# Altium PCB PCB1.PcbDoc
Units mil, origin at the board's own origin, x right, y up, seen from the top; angles counter-clockwise.
Board outline 6000 x 4000 mil, 2 copper layers (Top Layer, Bottom Layer); 7 components, 5 nets, 15 pads, 0 vias.
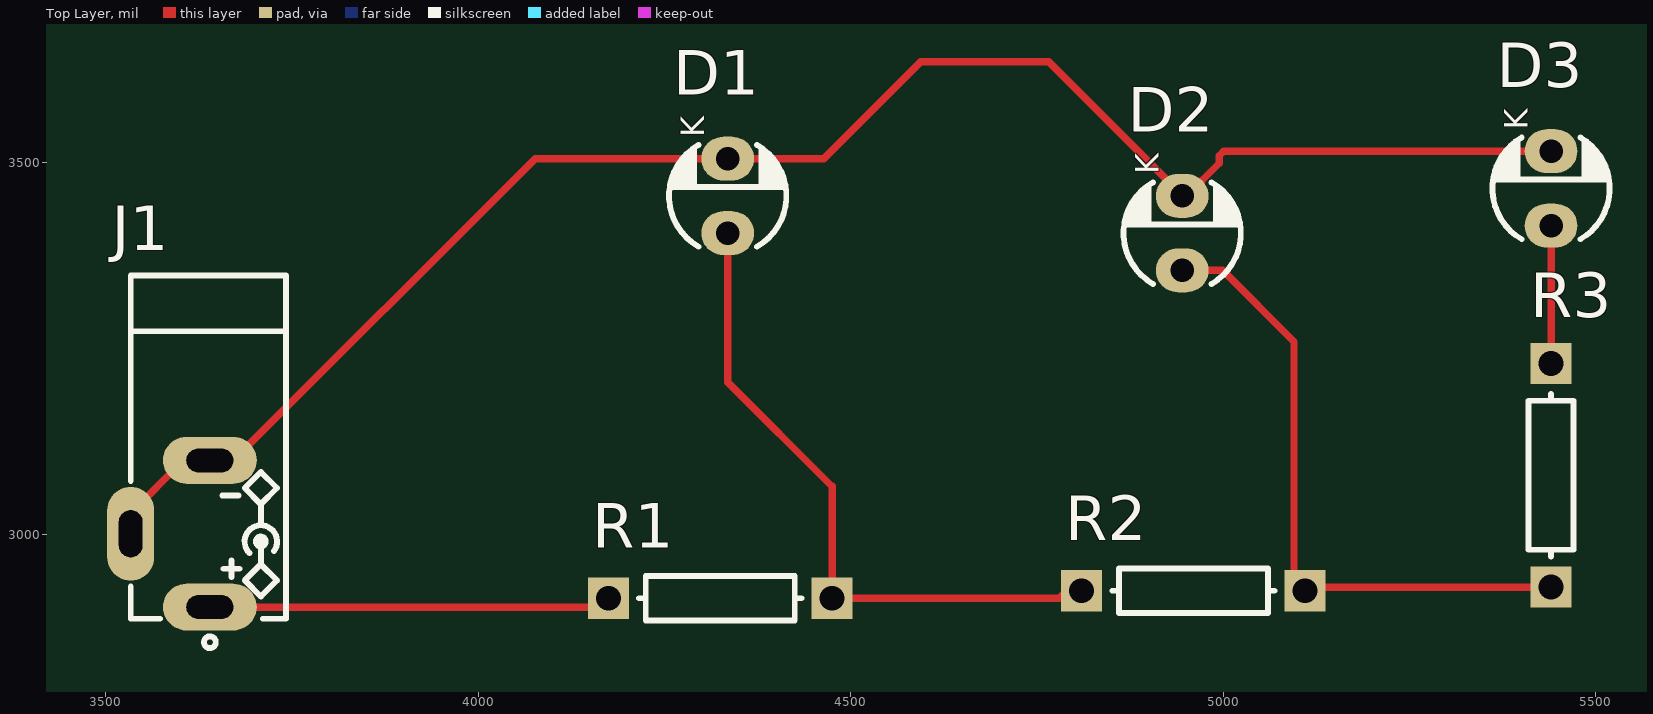
[diagram p0: Top Layer view]
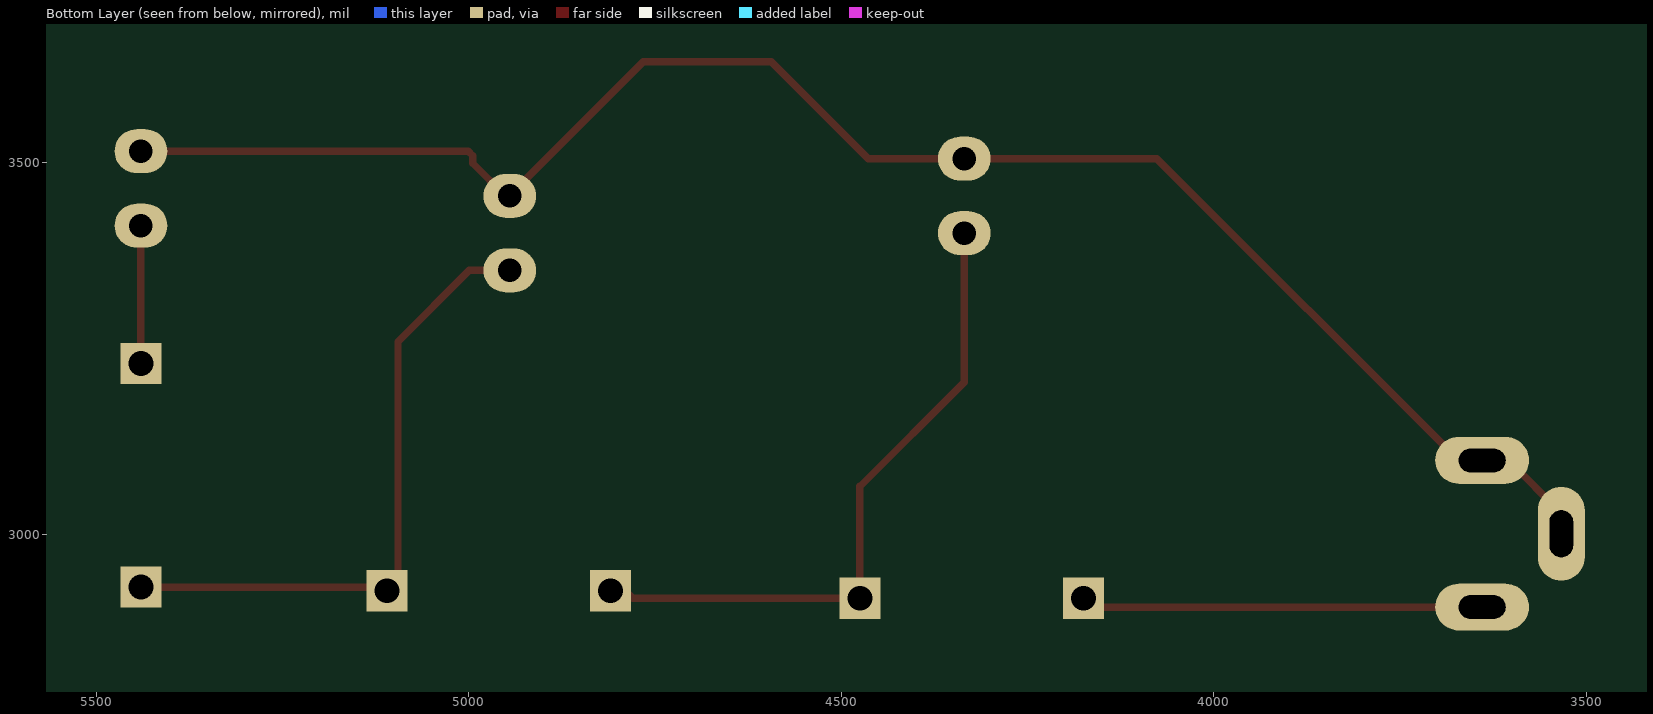
[diagram p1: Bottom Layer view, seen from below]
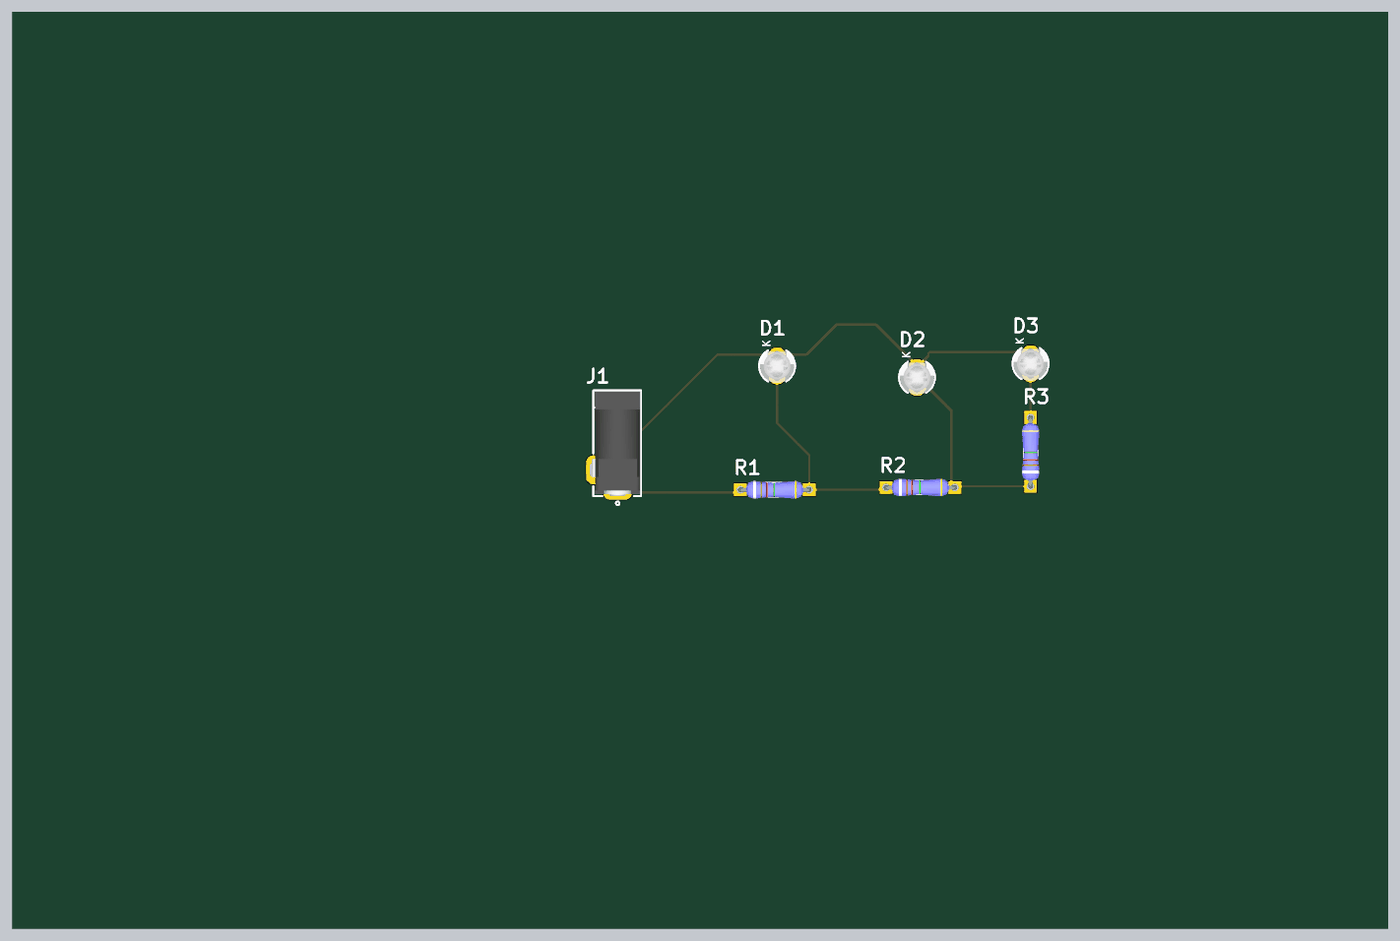
[diagram p2: 3D render of the assembled board from above, using the file's embedded part models]

## Layer stack, top to bottom
Top Solder: solder mask 0.4, Solder Resist, Dk 3.5
Top Layer: signal copper 1.4
Dielectric 1: dielectric 12.6, FR-4, Dk 4.8
Bottom Layer: signal copper 1.4
Bottom Solder: solder mask 0.4, Solder Resist, Dk 3.5

## Board outline
1000,1000 7000,1000 7000,5000 1000,5000

## Design rules (kind name [scope] priority, off if disabled: settings)
Clearance [All] p1: gap=10 ignorepadtopadclearanceinfootprint=FALSE
PolygonConnect [All] p1: connectstyle=Relief reliefconductorwidth=10 reliefentries=4 polygonreliefangle="90 Angle" airgapwidth=10
RoutingVias [All] p1: holewidth=28 width=50 viastyle="Through Hole" minholewidth=28 minwidth=50 maxholewidth=28 maxwidth=50
SolderMaskExpansion [All] p1: expansion=4 istentingtop=FALSE
SupplyNets "Schematic Supply Nets_1" [InNet('GND')] p1: voltage=0.000
SupplyNets "Schematic Supply Nets" [InNet('VCC')] p2: voltage=0.000
Width [All] p1: maxlimit=10 minlimit=10 preferedwidth=10
30 further rules are at their usual default settings.

## Components (designator, comment, footprint, x,y, rotation, side; value= is the part's Value field where it differs from the comment)
D1 "LED3MM" LED3MM 4335,3455 r90 top
D2 "LED3MM" LED3MM 4945,3405 r90 top
D3 "LED3MM" LED3MM 5440,3465 r90 top
J1 "DC_POWER_JACK" JAC_PWR1 3640,2903.15 r0 top
R1 "Resistor" Resistor_0.25w-0.3 4325,2915 r0 top value=1K
R2 "Resistor" Resistor_0.25w-0.3 4960,2925 r0 top value=1K
R3 "Resistor" Resistor_0.25w-0.3 5440,3080 r90 top value=1K

## Footprints (in the part's own frame and the unit in brackets; to place one, negate y for a bottom-side part, rotate by r counter-clockwise, add the part's x,y. Pads: shape width x height; smd on the part's side, far side on the other; paste and mask are expansions set on the pad)
JAC_PWR1 [mm] "DC POWER JACK, 1mm, Power Jack PJ-031C"
  oval 3.2x1.6 hole 0.8 slot 1.6 at 0 deg: 1(0,0) 2(0,5)
  oval 1.6x3.2 hole 0.8 slot 1.6 at 90 deg: 3(-2.7,2.5)
  silkscreen extent -2.7,-1.4 2.6,11.3, body extent -2.9,-0.4 2.5,11.2, height 7.4
LED3MM [mm] "LED THD 3MM"
  oval 1.5x1.8 hole 0.8: 1(-1.27,0) 2(1.27,0)
  silkscreen extent -1.73,-2 1.73,2, body extent -1.9,-1.9 1.6,1.9, height 6.5
Resistor_0.25w-0.3 [mm] "Axial Device, Thru-Hole; 2 Leads; 0.3 in Pin Spacing"
  rect 1.4x1.4 hole 0.85: 1(-3.81,0) 2(3.81,0)
  silkscreen extent -2.77,-0.76 2.77,0.76, body extent -4.06,-0.98 4.06,0.97, height 2.51

## Part data
D1 D2 D3: library part LED_THD_3MM, "LED, THD, 3MM, GREEN", ASSEMBLY=ASSEMBLY, DESC=DESCRIPTION, MANF=MANF, MANF_P#=MANF_PART#, PARAM2=2.2V, PRICE=PRICE
J1: library part CONN_PWR_JACKR1, "CONN, PWR JACK DC, PLUG DIAM 1.0MM RA THD", MANF="CUI STACK", MANF_P#="PJ-031CH, PJ-031C", PARAM="CH 3A, C 2A"
R1 R2 R3: Email=razi.vesali@gmail.com, LatestRevisionNote="Re-released for puplic", Published=17-Jun-2016, Publisher="Seyed Razi Vesali"

## Nets (pads, with @x,y where several pads share a name; then routed paths per layer and width w, separated by ;. In a path a pad name is that pad's centre, name@x,y a point inside that pad or via, vN(x,y) a via of type N, cw(c..) or ccw(c..) an arc to the next point about the centre after c; other vN are vias at no path point)
GND: D1.2 D2.2 D3.2 J1.2 J1.3 | length 2290.6
  Top Layer w10: J1.3 3533.7,3029.13 3604.57,3100 J1.2 3671.5,3100 4076.5,3505 D1.2 4463.88,3505 4593.88,3635 4765.91,3635 4945,3455.91 D2.2 4950.91,3455 4995,3499.09 4995,3509.14 5000.86,3515 D3.2
NetD1_1: D1.1 R1.2 R2.1 | length 874.2
  Top Layer w10: D1.1 4335,3205 4475,3065 R1.2 4780,2915 R2.1@4795,2930
NetD2_1: D2.1 R2.2 R3.1 | length 869.8
  Top Layer w10: D2.1@4939.09,3355 D2.1 4999.14,3355 5095,3259.14 5095,2930 R3.1
NetD3_1: D3.1 R3.2 | length 185
  Top Layer w10: R3.2 D3.1
VCC: J1.1 R1.1 | length 539.9
  Top Layer w10: J1.1 4163.15,2903.15 R1.1

## Text inside footprints (layer, text, board x,y; h text height)
D1: Top Overlay "K" at 4303.5,3533.74 h31.5 r90
D2: Top Overlay "K" at 4913.5,3483.74 h31.5 r90
D3: Top Overlay "K" at 5408.5,3543.74 h31.5 r90